# Altium PCB PCB1.PcbDoc
Units mil, origin at the board's own origin, x right, y up, seen from the top; angles counter-clockwise.
Board outline 2790.91 x 2890 mil, 2 copper layers (Top Layer, Bottom Layer); 61 components, 64 nets, 228 pads, 75 vias.
Unrouted connection lines stored in the file: 38.
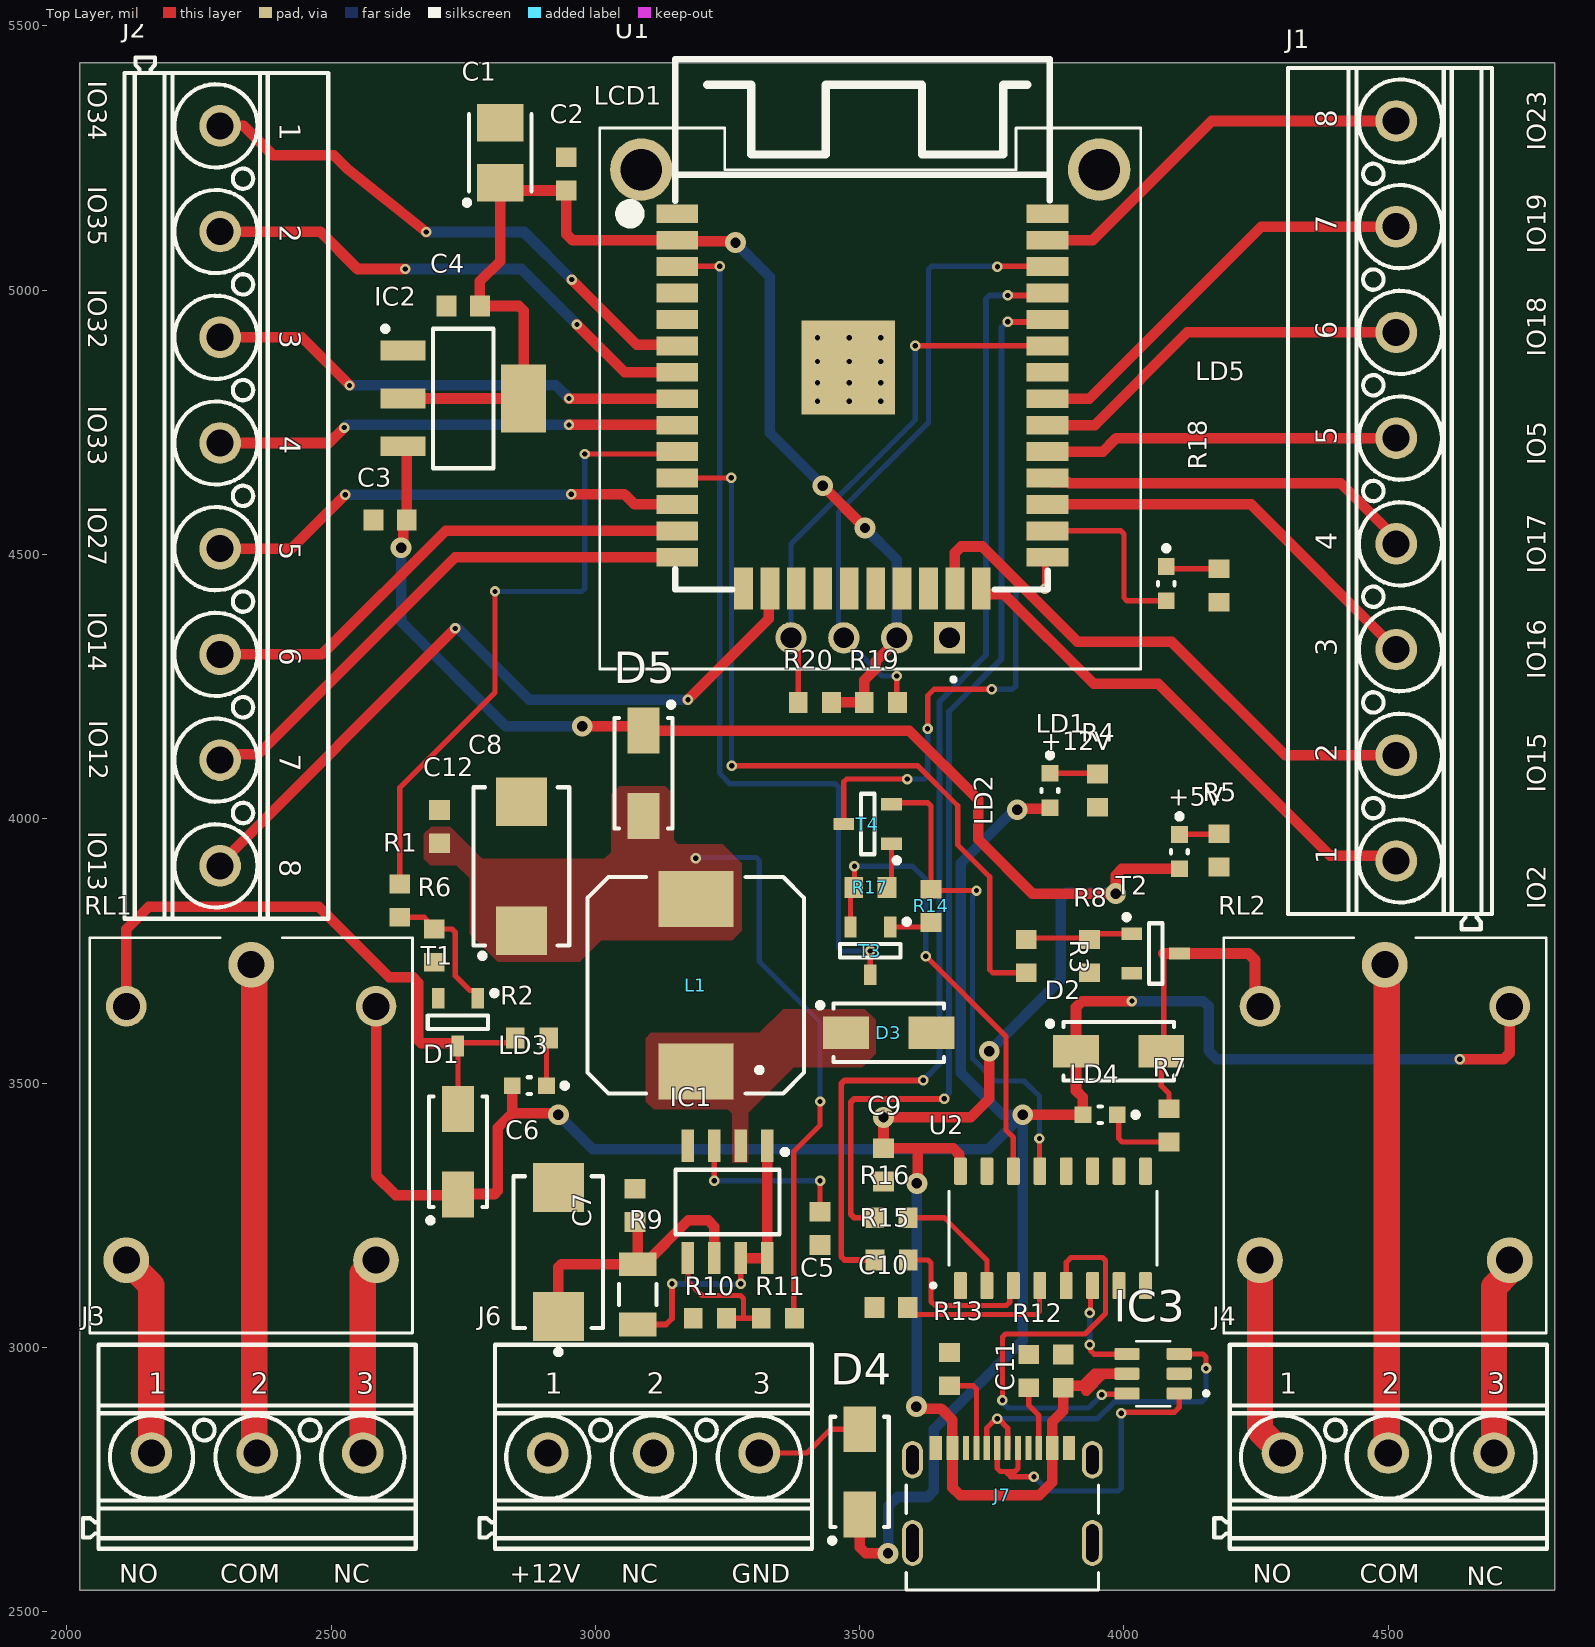
[diagram p0: Top Layer view]
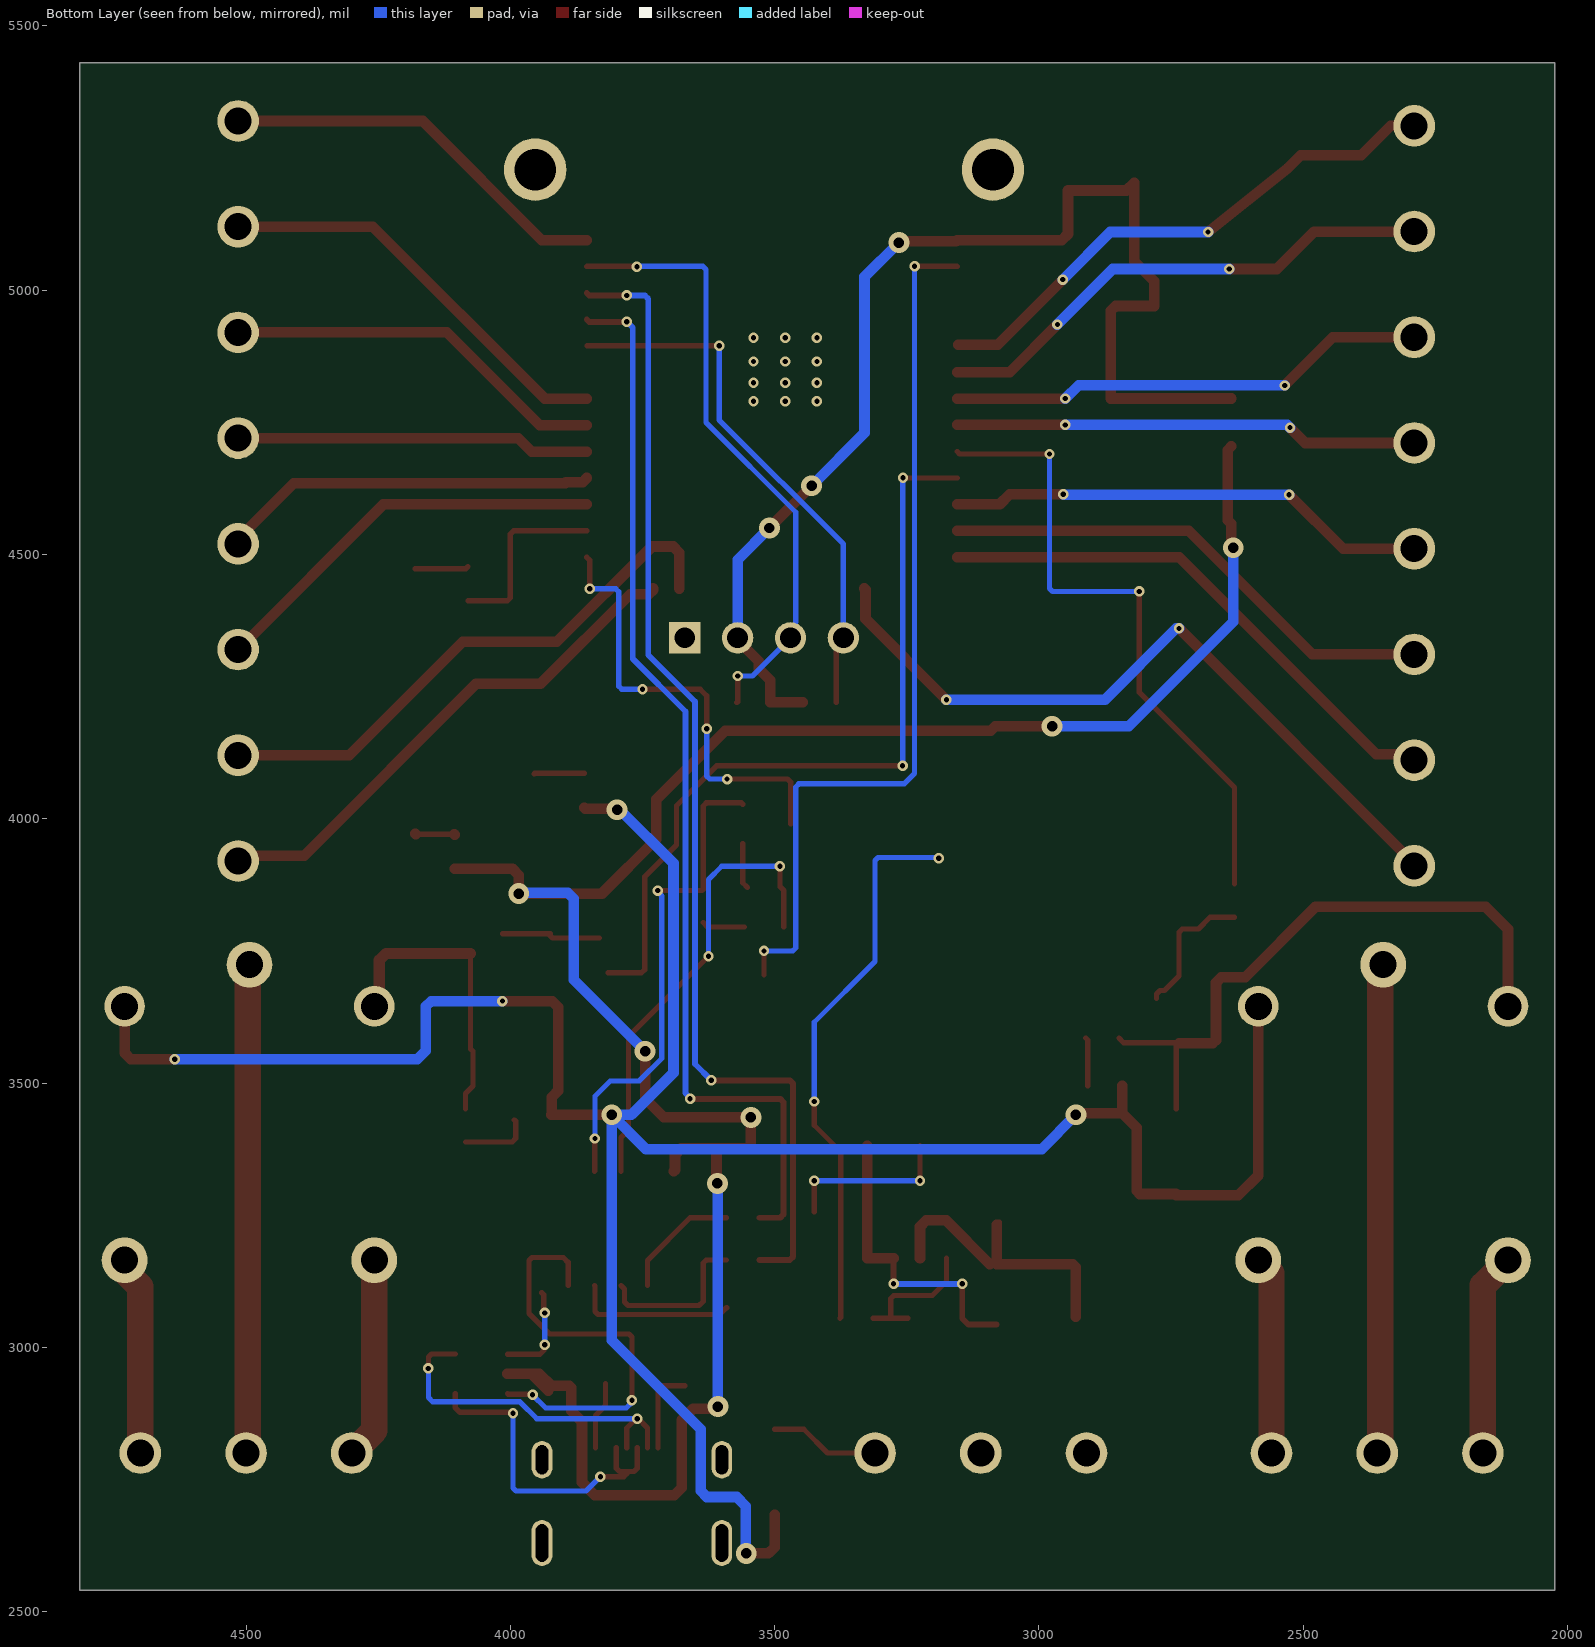
[diagram p1: Bottom Layer view, seen from below]
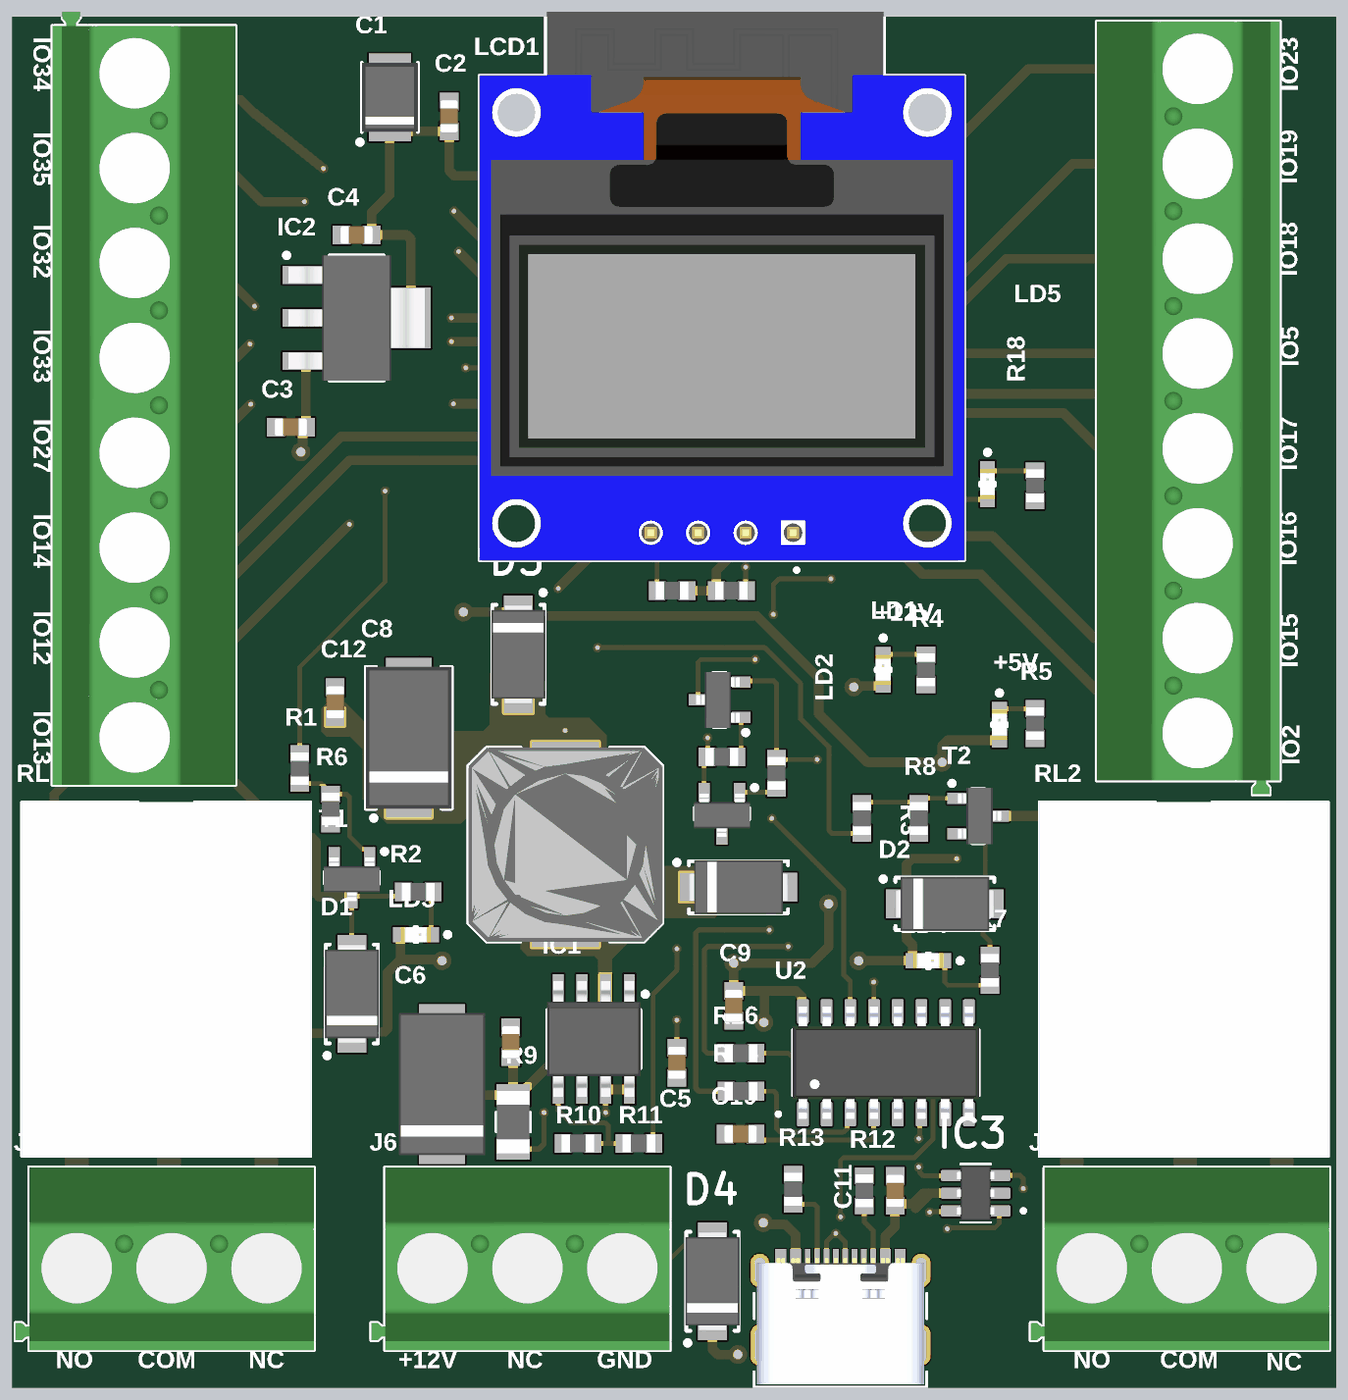
[diagram p2: 3D render of the assembled board from above, using the file's embedded part models]

## Layer stack, top to bottom
Top Solder: solder mask 0.4, Solder Resist, Dk 3.5
Top Layer: signal copper 1.4
Dielectric 1: dielectric 12.6, FR-4, Dk 4.8
Bottom Layer: signal copper 1.4
Bottom Solder: solder mask 0.4, Solder Resist, Dk 3.5

## Board outline
2024.09,2540 2024.09,5430 4815,5430 4815,2540

## Design rules (kind name [scope] priority, off if disabled: settings)
Clearance [All] p1: gap=7 ignorepadtopadclearanceinfootprint=FALSE
DiffPairsRouting [All] p1: maxlimit=10 minlimit=5.91 mostfreqgap=10 toplayer_minwidth=7.87 toplayer_maxwidth=15 toplayer_prefwidth=15 bottomlayer_minwidth=7.87 bottomlayer_maxwidth=15 bottomlayer_prefwidth=15 maxuncoupledlength=500
PolygonConnect [All] p1: connectstyle=Direct reliefconductorwidth=10 reliefentries=4 polygonreliefangle="90 Angle" airgapwidth=10
RoutingVias [All] p1: holewidth=28 width=50 viastyle="Through Hole" minholewidth=7.87 minwidth=19.68 maxholewidth=28 maxwidth=50
SolderMaskExpansion [All] p1: expansion=4 istentingtop=FALSE
SupplyNets "Schematic Supply Nets_4" [InNet('+5V')] p1: voltage=0.000
SupplyNets "Schematic Supply Nets_3" [InNet('+3V3')] p2: voltage=0.000
SupplyNets "Schematic Supply Nets_2" [InNet('VCC')] p3: voltage=0.000
SupplyNets "Schematic Supply Nets_1" [InNet('+12V')] p4: voltage=0.000
SupplyNets "Schematic Supply Nets" [InNet('GND')] p5: voltage=0.000
Width [All] p1: maxlimit=100 minlimit=10 preferedwidth=10 minimp=50.000000 maximp=50.000000 favimp=50.000000
29 further rules are at their usual default settings.

## Classes and differential pairs
component class Power: C3 C4 C5 C6 C7 C8 C12 D3 D4 D5 IC1 IC2 J6 L1 R9 R10 R11
component class Core: C1 C2 D1 D2 J2 J3 J4 LCD1 LD3 LD4 LD5 R1 R2 R3 R6 R7 R8 R18 R19 R20 RL1 RL2 T1 T2 U1
component class Com: C9 C10 C11 IC3 J7 R12 R13 R15 R16 R17 T3 T4 U2

## Components (designator, comment, footprint, x,y, rotation, side; value= is the part's Value field where it differs from the comment)
C1 "22uF" CAPMP3528X210N 2820,5260 r90 top
C2 "100nF" CAPC1608X87N 2945,5220 r270 top
C3 "100nF" CAPC1608X87N 2611.5,4565 r0 top
C4 "100nF" CAPC1608X87N 2750,4970 r0 top
C5 "470pF" CAPC1608X87N 3425,3225 r270 top
C6 "100uF" CAPMP7343X200N 2930,3180 r90 top
C7 "100nF" CAPC1608X87N 3075,3268.5 r270 top
C8 "470uF" CAPMP7343X310N 2860,3910 r90 top
C9 "100nF" CAPC1608X87N 3545,3345 r90 top
C10 "100nF" CAPC1608X87N 3559.33,3075 r0 top
C11 "100nF" CAPC1608X87N 3885,2955 r270 top
C12 "100nF" CAPC1608X87N 2705,3985 r90 top
D1 "SS16" DIOM5127X229N 2740,3370 r90 top
D2 "SS16" DIOM5127X229N 3990,3560 r0 top
D3 "SS16" DIOM5127X229N 3555,3595 r0 top
D4 "SS16" DIOM5127X229N 3500,2764.29 r90 top
D5 "SS16" DIOM5127X229N 3091,4086 r270 top
IC1 "MC34063AD" SOIC127P600X175-8N 3250,3275 r270 top
IC2 "SPX1117M3-L-1-8" SOT230P700X180-4N 2750,4795 r0 top
IC3 "usbClamp" usbClamps 4055,2950 r180 top
J1 "" PHOENIX_1715789 4515,4620 r90 top
J2 "" PHOENIX_1715789 2290,4610.83 r270 top
J3 "" PHOENIX_1715734 2360,2800 r0 top
J4 "" PHOENIX_1715734 4500,2800 r0 top
J6 "" PHOENIX_1715734 3110,2800 r0 top
J7 "2171790001" TYPEC 3770,2675 r0 top
L1 "220uH" IND_EPCOS_B82464-G4 3190,3685 r90 top value=470uH
LCD1 "OLED" OLED 3520,4795 r180 top locked
LD1 "Red" LED_KINGBRIGHT_KPH-1608SURCK 3860,4053.27 r270 top
LD2 "Green" LED_KINGBRIGHT_KP-1608CGCK 4105,3937.52 r270 top
LD3 "Red" LED_KINGBRIGHT_KPH-1608SURCK 2875,3495 r180 top
LD4 "Red" LED_KINGBRIGHT_KPH-1608SURCK 3955,3440 r180 top
LD5 "Green" LED_KINGBRIGHT_KP-1608CGCK 4080,4444.72 r270 top
R1 "220" RESC1608X55N 2630,3845 r270 top
R2 "2k2" RESC1608X55N 2880,3585 r0 top
R3 "220" RESC1608X55N 3815,3740 r90 top
R4 "2k2" RESC1608X55N 3950,4053.27 r90 top
R5 "470" RESC1608X55N 4180,3940 r90 top
R6 "10k" RESC1608X55N 2695,3760 r270 top
R7 "2k2" RESC1608X55N 4085,3420 r270 top
R8 "10k" RESC1608X55N 3935,3740 r270 top
R9 "0R33" RESC3216X65N 3080,3100 r270 top
R10 "1R2" RESC1608X55N 3216.5,3055 r0 top
R11 "3R6" RESC1608X55N 3345,3055 r0 top
R12 "5k1" RESC1608X55N 3820,2955 r90 top
R13 "5k1" RESC1608X55N 3670,2958.5 r90 top
R14 "10k" RESC1608X55N 3635,3835 r270 top
R15 "100" RESC1608X55N 3560.32,3165 r180 top
R16 "100" RESC1608X55N 3560,3245 r180 top
R17 "10k" RESC1608X55N 3520,3870 r0 top
R18 "47" RESC1608X55N 4180,4441.22 r90 top
R19 "10k" RESC1608X55N 3540,4220 r180 top
R20 "10k" RESC1608X55N 3415,4220 r0 top
RL1 "RELAY-PR13-12V-450-1C" RELAY_PR13-12V-450-1C 2350.24,3400 r270 top
RL2 "RELAY-PR13-12V-450-1C" RELAY_PR13-12V-450-1C 4495,3400 r270 top
T1 "BC817-40" SOT95P230X110-3N 2740,3615 r270 top
T2 "BC817-40" SOT95P230X110-3N 4060,3745 r0 top
T3 "BC817" SOT95P230X110-3N 3520,3750 r270 top
T4 "BC817" SOT95P230X110-3N 3515,3990 r180 top
U1 "ESP32-WROOM-32E" ESP32 3505,4790 r0 top locked
U2 "CH340" CH340 3865.69,3225 r90 top

## Footprints (in the part's own frame and the unit in brackets; to place one, negate y for a bottom-side part, rotate by r counter-clockwise, add the part's x,y. Pads: shape width x height; smd on the part's side, far side on the other; paste and mask are expansions set on the pad)
CAPC1608X87N [mm] "Chip Capacitor, Body 1.6x0.8mm IPC Medium Density"
  rect 0.95x1 smd: 1(-0.8,0) 2(0.8,0)
  body extent -0.87,-0.47 0.88,0.48, height 0.87
CAPMP3528X210N [mm] "Capacitor, Polarized, Molded  Body 3.5x2.8mm, IPC Medium Density"
  rect 1.8x2.25 smd: 1(-1.45,0) 2(1.45,0)
  silkscreen extent -2.52,-1.5 1.85,1.72, body extent -1.85,-1.5 1.85,1.5, height 2.1
CAPMP7343X200N [mm] "Capacitor, Polarized, Molded  Body 7.3x4.3mm, IPC Medium Density"
  rect 2.35x2.45 smd: 1(-3.1,0) 2(3.1,0)
  silkscreen extent -4.92,-2.15 3.65,2.15, body extent -3.8,-2.3 3.8,2.3, height 2
CAPMP7343X310N [mm] "Capacitor, Polarized, Molded  Body 7.3x4.3mm, IPC Medium Density"
  rect 2.35x2.45 smd: 1(-3.1,0) 2(3.1,0)
  silkscreen extent -4.42,-2.3 3.8,2.3, body extent -3.8,-2.3 3.8,2.3, height 3.1
CH340 [mm]
  rrect25% 1.31x0.62 smd: 1(-2.75,4.445) 2(-2.75,3.175) 3(-2.75,1.905) 4(-2.75,0.635) 5(-2.75,-0.635) 6(-2.75,-1.905) 7(-2.75,-3.175) 8(-2.75,-4.445) 9(2.75,-4.445) 10(2.75,-3.175) 11(2.75,-1.905) 12(2.75,-0.635) 13(2.75,0.635) 14(2.75,1.905) 15(2.75,3.175) 16(2.75,4.445)
  silkscreen extent -2.85,-5 1.78,5.85, body extent -3,-5 3,5, height 1.8
DIOM5127X229N [mm] "DO-214-AC/SMA Diode, Molded Body; 5.10mm L X 2.67mm W X 2.29mm H, IPC Medium Density"
  rect 2.2x1.55 smd: 1(-2.05,0) 2(2.05,0)
  silkscreen extent -3.42,-1.4 2.65,1.45, body extent -2.67,-1.45 2.68,1.45, height 2.29
ESP32 [mm]
  rect 2x0.9 smd: 1(-8.9,9.005) 2(-8.9,7.735) 3(-8.9,6.465) 4(-8.9,5.195) 5(-8.9,3.925) 6(-8.9,2.655) 7(-8.9,1.385) 8(-8.9,0.115) 9(-8.9,-1.155) 10(-8.9,-2.425) 11(-8.9,-3.695) 12(-8.9,-4.965) 13(-8.9,-6.235) 14(-8.9,-7.505) 25(8.9,-7.505) 26(8.9,-6.235) 27(8.9,-4.965) 28(8.9,-3.695) 29(8.9,-2.425) 30(8.9,-1.155) 31(8.9,0.115) 32(8.9,1.385) 33(8.9,2.655) 34(8.9,3.925) 35(8.9,5.195) 36(8.9,6.465) 37(8.9,7.735) 38(8.9,9.005)
  rect 0.9x2 smd: 15(-5.71,-9.005) 16(-4.44,-9.005) 17(-3.17,-9.005) 18(-1.9,-9.005) 19(-0.63,-9.005) 20(0.64,-9.005) 21(1.91,-9.005) 22(3.18,-9.005) 23(4.45,-9.005) 24(5.72,-9.005)
  rect 4.5x4.5 smd paste-0.115: 39(-0.675,1.615)
  silkscreen extent -11.53,-9.05 9,16.44, body extent -8.98,-8.97 9.02,16.53, height 3.28
IND_EPCOS_B82464-G4 [mm] "SMD Inductor Body Width 10.4mm Body Lenght 10.4mm Height 4.8mm"
  rect 2.7x3.6 smd: 1(-4.15,0) 2(4.15,0)
  silkscreen extent -5.2,-5.2 5.2,5.2, body extent -5.2,-5.2 5.2,5.2, height 4.9
LED_KINGBRIGHT_KP-1608CGCK [mm] "SMT Green LED, Case 0603, Body L 1.60mm x W 0.80mm x H 1.10mm"
  rect 0.8x0.8 smd: 1(-0.825,0) 2(0.825,0)
  silkscreen extent -1.82,-0.4 0.08,0.4, body extent -0.8,-0.4 0.8,0.4, height 1.1
LED_KINGBRIGHT_KPH-1608SURCK [mm] "SMT Hyper Red LED, Case 0603, Body L 1.6 x W 0.8mm H 0.65mm"
  rect 0.8x0.8 smd: 1(-0.825,0) 2(0.825,0)
  silkscreen extent -1.82,-0.4 0.08,0.4, body extent -0.8,-0.4 0.8,0.4, height 0.65
OLED [mm]
  rect 1.508x1.508 / inner round 1.508 / far side rect 1.508x1.508 hole 1: 1(-3.81,11.5)
  round 1.508 hole 1: 2(-1.27,11.5) 3(1.27,11.5) 4(3.81,11.5)
  round 3 hole 2: S3(11,-11) S4(-11,-11)
  silkscreen extent -13,-13 13,13.6, body extent -13,-13 13,13, height 6.66
PHOENIX_1715734 [mm] "Terminal Block, 17.5A 400V, Pitch 5.08mm, 3 Positions, Screw Connection"
  round 2 hole 1.3: 1(-5.08,0) 2(0,0) 3(5.08,0)
  silkscreen extent -8.36,-4.6 7.62,5.2, body extent -8.36,-4.6 7.62,5.2, height 14.2
PHOENIX_1715789 [mm] "Terminal Block, 17.5A 400V, Pitch 5.08mm, 8 Positions, Screw Connection"
  round 2 hole 1.3: 1(-17.78,0) 2(-12.7,0) 3(-7.62,0) 4(-2.54,0) 5(2.54,0) 6(7.62,0) 7(12.7,0) 8(17.78,0)
  silkscreen extent -21.06,-4.6 20.32,5.2, body extent -21.06,-4.6 20.32,5.2, height 14.2
RELAY_PR13-12V-450-1C [mm]
  round 1.95 hole 1.3: A1(-6.226,5.963) A2(-6.226,-6.037)
  round 2.2 hole 1.3: COM(-8.226,-0.037) NC(5.974,5.963) NO(5.974,-6.037)
  silkscreen extent -9.53,-7.79 9.47,7.71, body extent -9.53,-7.79 9.47,7.71, height 15.5
RESC1608X55N [mm] "Chip Resistor, EIA 0603, Metric 1608, Body 1.6x0.8mm, IPC Medium Density"
  rect 0.9x1 smd: 1(-0.8,0) 2(0.8,0)
  body extent -0.87,-0.47 0.88,0.48, height 0.55
RESC3216X65N [mm] "Chip Resistor, EIA 1206, Metric 3216, Body 3.2x1.6mm, IPC Medium Density"
  rect 1.15x1.8 smd: 1(-1.45,0) 2(1.45,0)
  silkscreen extent -0.5,-0.9 0.5,0.9, body extent -1.67,-0.87 1.68,0.88, height 0.65
SOIC127P600X175-8N [mm] "SOIC 8, Pitch 1.27mm - Body 4x5mm, IPC Medium Density"
  rect 1.55x0.6 smd: 1(-2.7,1.905) 2(-2.7,0.635) 3(-2.7,-0.635) 4(-2.7,-1.905) 5(2.7,-1.905) 6(2.7,-0.635) 7(2.7,0.635) 8(2.7,1.905)
  silkscreen extent -2.52,-2.5 1.55,2.88, body extent -3.1,-2.5 3.1,2.5, height 1.75
SOT95P230X110-3N [mm] "SOT23, 3 pin, Pitch 0.95mm - 1.3mm W X 2.9mm L X 1.1mm H, IPC Medium Density"
  rect 1x0.6 smd: 1(-1.15,0.95) 2(-1.15,-0.95) 3(1.15,0)
  silkscreen extent -1.52,-1.45 0.33,1.88, body extent -1.08,-1.5 1.25,1.5, height 1.1
SOT230P700X180-4N [mm] "SOT223, 2.30mm pitch; 3 pin, 3.70mm W X 6.70mm L, IPC Medium Density"
  rect 2.15x0.95 smd: 1(-2.9,2.3) 2(-2.9,0) 3(-2.9,-2.3)
  rect 2.15x3.25 smd: 4(2.9,0)
  silkscreen extent -3.87,-3.35 1.45,3.47, body extent -3.65,-3.35 3.65,3.35, height 1.81
TYPEC [mm]
  rect 0.59x1.15 smd mask+0.064: A1B12(-3.2,3.425) A4B9(-2.4,3.425) B1A12(3.2,3.425) B4A9(2.4,3.425)
  rect 0.298x1.15 smd mask+0.064: A5(-1.25,3.425) A6(-0.25,3.425) A7(0.25,3.425) A8(1.25,3.425) B5(1.75,3.425) B6(0.75,3.425) B7(-0.75,3.425) B8(-1.75,3.425)
  oval 1x2.2 hole 0.6 slot 1.8 at 90 deg mask+0.064: SH1(-4.32,-1.15) SH2(4.32,-1.15)
  oval 1x1.8 hole 0.6 slot 1.4 at 90 deg mask+0.064: SH3(-4.32,2.85) SH4(4.32,2.85)
  silkscreen extent -4.62,-3.4 4.62,1.63, body extent -4.47,-3.25 4.47,3.5, height 3.24
usbClamps [mm]
  rrect25% 1.21x0.59 smd: 1(-1.255,0.95) 2(-1.255,0) 3(-1.255,-0.95) 4(1.255,-0.95) 5(1.255,0) 6(1.255,0.95)
  silkscreen extent -2.66,-1.57 0.81,1.57, body extent -1.4,-1.46 1.4,1.46, height 0.4

## Part data
C1: library part CTE3528-21_22UF_10V_10%_LESR0700, "Polarised capacitor", Case=B, Manufacturer=GENERIC, Manufacturer1 ComponentHeight=2.1mm, Manufacturer1 Example=AVX, Manufacturer1 Part Number=TPSB226K010R0700, Tolerance=±10%, Voltage=10V, Author="CERN DEM JLC", Component Type=Standard, CreateDate=5.05.2008, HelpURL=\\cern.ch\dfs\Applications\Altium\Datasheets\CTE-LESR_AVX_TPS.pdf, LatestRevisionDate=20.01.2009, Manufacturer Part Number=CTE3528-21_22UF_10V_10%_LESR0700, Mounted=Yes, Part Description="Low ESR 0R7 Solid Tantalum Chip Capacitor", Part Number=CTE3528-21_22UF_10V_10%_LESR0700, Pin Count=2, Sense=No, SMD=Yes, Socket=No, Status=Preferred
C2 C3 C4 C7 C9 C10 C11 C12: library part CC0603_100NF_50V_10%_X5R, "Non-polarised capacitor", Case=0603, Manufacturer=GENERIC, Manufacturer1 ComponentHeight=0.9mm, Manufacturer1 Example=TDK, Manufacturer1 Part Number=C1608X5R1H104K080, Tolerance=±10%, Voltage=50V, Author="CERN DEM MR", Component Type=Standard, CreateDate=8.01.2016, HelpURL=\\cern.ch\dfs\Applications\Altium\Datasheets\CC0603_X5R_TDK_C.pdf, LatestRevisionDate=8.01.2016, Manufacturer Part Number=CC0603_100NF_50V_10%_X5R, Mounted=Yes, Part Description="SMD Multilayer Chip Ceramic Capacitor", Part Number=CC0603_100NF_50V_10%_X5R, Pin Count=2, Sense=No, SMD=Yes, Socket=No, Status=None, TC=X5R
C5: library part CC0603_470PF_50V_5%_NP0, "Non-polarised capacitor", Case=0603, Manufacturer=GENERIC, Manufacturer1 ComponentHeight=0.87mm, Manufacturer1 Example=PHYCOMP, Manufacturer1 Part Number=223886715471, Tolerance=±5%, Voltage=50V, Author="CERN DEM JLC", Component Type=Standard, CreateDate=3.12.2007, HelpURL=\\cern.ch\dfs\Applications\Altium\Datasheets\CC0603_NP0_PHYCOMP.pdf, LatestRevisionDate=3.12.2007, Manufacturer Part Number=CC0603_470PF_50V_5%_NP0, Mounted=Yes, Part Description="SMD Multilayer Chip Ceramic Capacitor", Part Number=CC0603_470PF_50V_5%_NP0, Pin Count=2, Sense=No, SMD=Yes, Socket=No, Status=Preferred, TC=C0G/NP0
C6: library part CTE7343-20_100UF_10V_20%_SANYO_TPC, "Polarised capacitor", Case=V, Manufacturer=SANYO, Manufacturer Part Number=10TPC100M, Tolerance=±20%, Voltage=10V, Author="CERN DEM JLC", Component Type=Standard, ComponentHeight=2mm, CreateDate=29.06.2011, HelpURL=\\cern.ch\dfs\Applications\Altium\Datasheets\CTE_SANYO_TPC.pdf, LatestRevisionDate=29.06.2011, Mounted=Yes, Part Description="ESR 0R045 Tantalum Chip Capacitor", Part Number=CTE7343-20_100UF_10V_20%_SANYO_TPC, Pin Count=2, Sense=No, SMD=Yes, Socket=No, Status=None
C8: library part CTE7343-31_470UF_6.3V_10%, "Polarised capacitor", Case=D, Manufacturer=GENERIC, Manufacturer1 ComponentHeight=3.1mm, Manufacturer1 Example=AVX, Manufacturer1 Part Number=TAJD477K006R, Tolerance=±10%, Voltage=6.3V, Author="CERN DEM JLC", Component Type=Standard, CreateDate=3.12.2007, HelpURL=\\cern.ch\dfs\Applications\Altium\Datasheets\CTE_AVX_TAJ.pdf, LatestRevisionDate=3.12.2007, Manufacturer Part Number=CTE7343-31_470UF_6.3V_10%, Mounted=Yes, Part Description="Solid Tantalum Chip Capacitor", Part Number=CTE7343-31_470UF_6.3V_10%, Pin Count=2, Sense=No, SMD=Yes, Socket=No, Status=Preferred
D1 D2 D3 D4 D5: "Schottky Diode", Case=DO-214AC, Manufacturer="VISHAY GENERAL SEMICONDUCTOR", Power=1A, Voltage=60V, Author="CERN DEM JLC", Bonding=No, Component Type=Standard, ComponentHeight=2.29mm, CreateDate=15.07.2008, Device=SS16, HelpURL=\\cern.ch\dfs\Applications\Altium\Datasheets\SS16.pdf, LatestRevisionDate=23.08.2010, Manufacturer Part Number=SS16, Mounted=Yes, PackageDescription="DO-214-AC/SMA Diode, Molded Body; 5.10mm L X 2.67mm W X 2.29mm H, IPC Medium Density", Part Description="Surface Mount Schottky Barrier Rectifier", Part Number=SS16, Pin Count=2, PressFit=No, Sense=No, SMD=Yes, Socket=No
IC1: "3V to 40V 1.5A Peak Boost/Buck/Inverting Switching Regulator", Case=SOIC8, Manufacturer="TEXAS INSTRUMENTS", Author="CERN DEM JLC", Bonding=No, Component Type=Standard, ComponentHeight=1.75mm, CreateDate=27.10.2009, Device=MC34063AD, HelpURL=\\cern.ch\dfs\Applications\Altium\Datasheets\MC34063AD.pdf, LatestRevisionDate=27.10.2009, Manufacturer Part Number=MC34063AD, Mounted=Yes, PackageDescription="SOIC 8, Pitch 1.27mm, Body 4x5mm, IPC Medium Density", Part Description="3V to 40V 1.5A Peak Boost/Buck/Inverting Switching Regulator", Part Number=MC34063AD, Pin Count=8, PressFit=No, Sense=No, SMD=Yes, Socket=No
IC2: "3-Terminal Regulator 1=GND 2=OUT 3=IN 4=OUT", Case=SOT223, Manufacturer=EXAR, Author="CERN DEM JLC", Bonding=No, Component Type=Standard, ComponentHeight=1.8mm, CreateDate=5.07.2011, Device=SPX1117M3-L-1-8, HelpURL=\\cern.ch\dfs\Applications\Altium\Datasheets\SPX1117M3-L-1-8.pdf, LatestRevisionDate=5.07.2011, Manufacturer Part Number=SPX1117M3-L-1-8, Mounted=Yes, PackageDescription="SOT223, 2.30mm Pitch; 4 Pin, 3.70mm W X 6.70mm L X 1.80mm H body, IPC Medium Density", Part Description="1.8V 800mA Low Dropout Voltage Regulator", Part Number=SPX1117M3-L-1-8, Pin Count=4, PressFit=No, Sense=No, SMD=Yes, Socket=No
J1 J2: library part PHOENIX_1715789, "Terminal Block, 8 Positions, Screw Connection", Manufacturer="PHOENIX CONTACT", Manufacturer Part Number="1715789 (MKDS 1,5/8-5,08)", Author="CERN DEM JMW", Component Type=Standard, ComponentHeight=13.8mm, CreateDate=25.02.2013, HelpURL=\\cern.ch\dfs\Applications\Altium\Datasheets\PHOENIX_1715789.pdf, LatestRevisionDate=25.02.2013, Mounted=Yes, Part Description="17.5A, 400V, Terminal Block, Pitch 5.08mm, 8 Positions, Screw Connection", Part Number=PHOENIX_1715789, Pin Count=8, PressFit=No, Sense=No, SMD=No, Socket=No, Status=None
J3 J4 J6: library part PHOENIX_1715734, "Terminal Block, 3 Positions, Screw Connection", Manufacturer="PHOENIX CONTACT", Manufacturer Part Number="1715734 (MKDS 1,5/3-5,08)", Author="CERN DEM JLC", Component Type=Standard, ComponentHeight=13.8mm, CreateDate=6.01.2010, HelpURL=\\cern.ch\dfs\Applications\Altium\Datasheets\PHOENIX_1715734.pdf, LatestRevisionDate=25.02.2013, Mounted=Yes, Part Description="17.5A, 400V, Terminal Block, Pitch 5.08mm, 3 Positions, Screw Connection", Part Number=PHOENIX_1715734, Pin Count=3, PressFit=No, Sense=No, SMD=No, Socket=No, Status=None
J7: library part "TypeC USB2.0 16pin SMD"
L1: library part IND_470UH_20%_EPCOS_B82464-G4, "Inductor With Core", Manufacturer=EPCOS, Manufacturer Part Number=B82464–G4474–M, Power=0.5A, Resistance=0.93R, Tolerance=±20%, Author="CERN DEM JLC", Component Type=Standard, ComponentHeight=4.8mm, CreateDate=17.11.2008, HelpURL=\\cern.ch\dfs\Applications\Altium\Datasheets\IND_EPCOS_B82464-G4.pdf, LatestRevisionDate=17.11.2008, Mounted=Yes, Part Description="SMT Power Inductor", Part Number=IND_470UH_20%_EPCOS_B82464-G4, Pin Count=2, Sense=No, SMD=Yes, Socket=No
LCD1: library part "OLED SCREEN"
LD1 LD3 LD4: library part LED_KINGBRIGHT_KPH-1608SURCK, "LED Red 1C 2A", Case=0603, Manufacturer=KINGBRIGHT, Manufacturer Part Number=KPH-1608SURCK, Author="CERN DEM JLC", Bonding=No, Color=Red, Component Type=Standard, ComponentHeight=0.65mm, CreateDate=3.07.2017, HelpURL=\\cern.ch\dfs\Applications\Altium\Datasheets\LED_KINGBRIGHT_KPH-1608SURCK.pdf, LatestRevisionDate=3.07.2017, Mounted=Yes, PackageDescription="SMT Hyper Red LED, Case 0603, Body L 1.6 x W 0.8mm H 0.65mm", Part Description="SMD Hyper Red LED, Case 1.6mmX0.8mm(0603), 0.65mm Thickness", Part Number=LED_KINGBRIGHT_KPH-1608SURCK, Pin Count=2, PressFit=No, Sense=No, SMD=Yes, Socket=No
LD2 LD5: library part LED_KINGBRIGHT_KP-1608CGCK, "LED Green 1C 2A", Case=0603, Manufacturer=KINGBRIGHT, Manufacturer Part Number=KP-1608CGCK, Author="CERN DEM HF", Bonding=No, Color=Green, Component Type=Standard, ComponentHeight=1.1mm, CreateDate=1.10.2021, HelpURL=\\cern.ch\dfs\Applications\Altium\Datasheets\LED_KINGBRIGHT_KP-1608CGCK.pdf, LatestRevisionDate=1.10.2021, Mounted=Yes, PackageDescription="SMT Green LED, Case 0603, Body L 1.60mm x W 0.80mm x H 1.10mm", Part Description="1.6x0.8mm SMD Chip Green LED Lamp", Part Number=LED_KINGBRIGHT_KP-1608CGCK, Pin Count=2, PressFit=No, Sense=No, SMD=Yes, Socket=No
R1 R3: library part R0603_220R_1%_0.1W_100PPM, "Resistor - 1%", Case=0603, Manufacturer=GENERIC, Manufacturer1 ComponentHeight=0.55mm, Manufacturer1 Example="NIC COMPONENT", Manufacturer1 Part Number=NRC06F2200TRF, Power=0.1W, Tolerance=±1%, Author="CERN DEM JLC", Component Type=Standard, CreateDate=3.12.2007, HelpURL=\\cern.ch\dfs\Applications\Altium\Datasheets\R0603_NIC_NRC.pdf, LatestRevisionDate=13.03.2008, Manufacturer Part Number=R0603_220R_1%_0.1W_100PPM, Mounted=Yes, Part Description="General Purpose Thick Film Chip Resistor", Part Number=R0603_220R_1%_0.1W_100PPM, Pin Count=2, PressFit=No, Sense=No, SMD=Yes, Socket=No, Status=Preferred, TC=±100ppm/°C
R2 R4 R7: library part R0603_2K2_1%_0.1W_100PPM, "Resistor - 1%", Case=0603, Manufacturer=GENERIC, Manufacturer1 ComponentHeight=0.55mm, Manufacturer1 Example="NIC COMPONENT", Manufacturer1 Part Number=NRC06F2201TRF, Power=0.1W, Tolerance=±1%, Author="CERN DEM JLC", Component Type=Standard, CreateDate=3.12.2007, HelpURL=\\cern.ch\dfs\Applications\Altium\Datasheets\R0603_NIC_NRC.pdf, LatestRevisionDate=13.03.2008, Manufacturer Part Number=R0603_2K2_1%_0.1W_100PPM, Mounted=Yes, Part Description="General Purpose Thick Film Chip Resistor", Part Number=R0603_2K2_1%_0.1W_100PPM, Pin Count=2, PressFit=No, Sense=No, SMD=Yes, Socket=No, Status=Preferred, TC=±100ppm/°C
R5: library part R0603_470R_1%_0.1W_100PPM, "Resistor - 1%", Case=0603, Manufacturer=GENERIC, Manufacturer1 ComponentHeight=0.55mm, Manufacturer1 Example="NIC COMPONENT", Manufacturer1 Part Number=NRC06F4700TRF, Power=0.1W, Tolerance=±1%, Author="CERN DEM JLC", Component Type=Standard, CreateDate=3.12.2007, HelpURL=\\cern.ch\dfs\Applications\Altium\Datasheets\R0603_NIC_NRC.pdf, LatestRevisionDate=13.03.2008, Manufacturer Part Number=R0603_470R_1%_0.1W_100PPM, Mounted=Yes, Part Description="General Purpose Thick Film Chip Resistor", Part Number=R0603_470R_1%_0.1W_100PPM, Pin Count=2, PressFit=No, Sense=No, SMD=Yes, Socket=No, Status=Preferred, TC=±100ppm/°C
R6 R8 R14 R17: library part R0603_10K_1%_0.1W_100PPM, "Resistor - 1%", Case=0603, Manufacturer=GENERIC, Manufacturer1 ComponentHeight=0.55mm, Manufacturer1 Example="NIC COMPONENT", Manufacturer1 Part Number=NRC06F1002TRF, Power=0.1W, Tolerance=±1%, Author="CERN DEM JLC", Component Type=Standard, CreateDate=3.12.2007, HelpURL=\\cern.ch\dfs\Applications\Altium\Datasheets\R0603_NIC_NRC.pdf, LatestRevisionDate=13.03.2008, Manufacturer Part Number=R0603_10K_1%_0.1W_100PPM, Mounted=Yes, Part Description="General Purpose Thick Film Chip Resistor", Part Number=R0603_10K_1%_0.1W_100PPM, Pin Count=2, PressFit=No, Sense=No, SMD=Yes, Socket=No, Status=Preferred, TC=±100ppm/°C
R9: library part R1206_0R33_1%_0.5W_600PPM, "Resistor - 1%", Case=1206, Manufacturer="YAGEO PHYCOMP", Manufacturer Part Number="RL1206FR-7W0R33 (235051913307)", Power=0.5W, Tolerance=±1%, Author="CERN DEM JMW", Component Type=Standard, ComponentHeight=0.65mm, CreateDate=6.01.2009, HelpURL=\\cern.ch\dfs\Applications\Altium\Datasheets\R1206_PHYCOMP_LRC02P.pdf, LatestRevisionDate=6.01.2009, Mounted=Yes, Part Description="Low Ohmique High Power Chip Resistor", Part Number=R1206_0R33_1%_0.5W_600PPM, Pin Count=2, PressFit=No, Sense=No, SMD=Yes, Socket=No, Status="Not Recommended", TC=±600ppm/°C
R10: library part R0603_1R2_1%_0.1W_200PPM, "Resistor - 1%", Case=0603, Manufacturer=GENERIC, Manufacturer1 ComponentHeight=0.65mm, Manufacturer1 Example="YAGEO PHYCOMP", Manufacturer1 Part Number="232270461208L or RC0603FR-071R2L", Power=0.1W, Tolerance=±1%, Author="CERN DEM JLC", Component Type=Standard, CreateDate=3.12.2007, HelpURL=\\cern.ch\dfs\Applications\Altium\Datasheets\R0603_Phycomp_RC0603.pdf, LatestRevisionDate=17.10.2012, Manufacturer Part Number=R0603_1R2_1%_0.1W_200PPM, Mounted=Yes, Part Description="General Purpose Thick Film Chip Resistor", Part Number=R0603_1R2_1%_0.1W_200PPM, Pin Count=2, PressFit=No, Sense=No, SMD=Yes, Socket=No, Status=Preferred, TC=±200ppm/°C
R11: library part R0603_3R6_1%_0.1W_200PPM, "Resistor - 1%", Case=0603, Manufacturer=GENERIC, Manufacturer1 ComponentHeight=0.65mm, Manufacturer1 Example="YAGEO PHYCOMP", Manufacturer1 Part Number="232270463608L or RC0603FR-073R6L", Power=0.1W, Tolerance=±1%, Author="CERN DEM JLC", Component Type=Standard, CreateDate=3.12.2007, HelpURL=\\cern.ch\dfs\Applications\Altium\Datasheets\R0603_Phycomp_RC0603.pdf, LatestRevisionDate=17.10.2012, Manufacturer Part Number=R0603_3R6_1%_0.1W_200PPM, Mounted=Yes, Part Description="General Purpose Thick Film Chip Resistor", Part Number=R0603_3R6_1%_0.1W_200PPM, Pin Count=2, PressFit=No, Sense=No, SMD=Yes, Socket=No, Status=Preferred, TC=±200ppm/°C
R12 R13: library part R0603_5K1_1%_0.1W_100PPM, "Resistor - 1%", Case=0603, Manufacturer=GENERIC, Manufacturer1 ComponentHeight=0.55mm, Manufacturer1 Example="NIC COMPONENT", Manufacturer1 Part Number=NRC06F5101TRF, Power=0.1W, Tolerance=±1%, Author="CERN DEM JLC", Component Type=Standard, CreateDate=3.12.2007, HelpURL=\\cern.ch\dfs\Applications\Altium\Datasheets\R0603_NIC_NRC.pdf, LatestRevisionDate=13.03.2008, Manufacturer Part Number=R0603_5K1_1%_0.1W_100PPM, Mounted=Yes, Part Description="General Purpose Thick Film Chip Resistor", Part Number=R0603_5K1_1%_0.1W_100PPM, Pin Count=2, PressFit=No, Sense=No, SMD=Yes, Socket=No, Status=Preferred, TC=±100ppm/°C
R15 R16: library part R0603_100R_1%_0.1W_100PPM, "Resistor - 1%", Case=0603, Manufacturer=GENERIC, Manufacturer1 ComponentHeight=0.55mm, Manufacturer1 Example="NIC COMPONENT", Manufacturer1 Part Number=NRC06F4700TRF, Power=0.1W, Tolerance=±1%, Author="CERN DEM JLC", Component Type=Standard, CreateDate=3.12.2007, HelpURL=\\cern.ch\dfs\Applications\Altium\Datasheets\R0603_NIC_NRC.pdf, LatestRevisionDate=13.03.2008, Manufacturer Part Number=R0603_100R_1%_0.1W_100PPM, Mounted=Yes, Part Description="General Purpose Thick Film Chip Resistor", Part Number=R0603_100R_1%_0.1W_100PPM, Pin Count=2, PressFit=No, Sense=No, SMD=Yes, Socket=No, Status=Preferred, TC=±100ppm/°C
R18: library part R0603_47R_1%_0.1W_100PPM, "Resistor - 1%", Case=0603, Manufacturer=GENERIC, Manufacturer1 ComponentHeight=0.55mm, Manufacturer1 Example="NIC COMPONENT", Manufacturer1 Part Number=NRC06F47R0TRF, Power=0.1W, Tolerance=±1%, Author="CERN DEM JLC", Component Type=Standard, CreateDate=3.12.2007, HelpURL=\\cern.ch\dfs\Applications\Altium\Datasheets\R0603_NIC_NRC.pdf, LatestRevisionDate=13.03.2008, Manufacturer Part Number=R0603_47R_1%_0.1W_100PPM, Mounted=Yes, Part Description="General Purpose Thick Film Chip Resistor", Part Number=R0603_47R_1%_0.1W_100PPM, Pin Count=2, PressFit=No, Sense=No, SMD=Yes, Socket=No, Status=Preferred, TC=±100ppm/°C
R19 R20: library part R0603_10K_0.1%_0.063W_10PPM, "Resistor - 0.1%", Case=0603, Manufacturer=GENERIC, Manufacturer1 ComponentHeight=0.5mm, Manufacturer1 Example="TYCO HOLSWORTHY", Manufacturer1 Part Number=RN73C1J10KBTDF, Power=0.063W, Tolerance=±0.1%, Author="CERN DEM JLC", Component Type=Standard, CreateDate=3.12.2007, HelpURL=\\cern.ch\dfs\Applications\Altium\Datasheets\R0603_Tyco_RN73.pdf, LatestRevisionDate=13.03.2008, Manufacturer Part Number=R0603_10K_0.1%_0.063W_10PPM, Mounted=Yes, Part Description="Thin Film Chip Resistor", Part Number=R0603_10K_0.1%_0.063W_10PPM, Pin Count=2, PressFit=No, Sense=No, SMD=Yes, Socket=No, Status="Not Recommended", TC=±10ppm
T1 T2 T3 T4: "NPN Transistor", Case=SOT23-3, Manufacturer="NXP SEMICONDUCTORS", Bonding=No, Component Type=Standard, ComponentHeight=1.1mm, Mounted=Yes, PackageDescription="SOT23, 0.95mm Pitch; 3 Pin, 1.30mm W X 2.90mm L X 1.10mm H body, IPC Medium Density", Part Description="45V 500mA NPN General-Purpose Transistor", Pin Count=3, PressFit=No, Sense=No, SMD=Yes, Socket=No
  T1 T2: Author="CERN DEM BC", CreateDate=29.04.2020, Device=BC817-40, HelpURL=\\cern.ch\dfs\Applications\Altium\Datasheets\BC817-40.pdf, LatestRevisionDate=29.04.2020, Manufacturer Part Number=BC817-40, Part Number=BC817-40
  T3 T4: Author="CERN DEM JLC", CreateDate=12.05.2011, Device=BC817, HelpURL=\\cern.ch\dfs\Applications\Altium\Datasheets\BC817.pdf, LatestRevisionDate=12.05.2011, Manufacturer Part Number=BC817, Part Number=BC817

## Via types
v1: diameter 19.68, hole 10, Top Layer to Bottom Layer, tented both sides, 49 vias
v2: diameter 39.37, hole 19.68, Top Layer to Bottom Layer, tented both sides, 14 vias
v3: diameter 19.68, hole 10, Top Layer to Bottom Layer, 12 vias

## Nets (pads, with @x,y where several pads share a name; then routed paths per layer and width w, separated by ;. In a path a pad name is that pad's centre, name@x,y a point inside that pad or via, vN(x,y) a via of type N, cw(c..) or ccw(c..) an arc to the next point about the centre after c; other vN are vias at no path point)
+3V3: C1.1 C2.2 C4.2 IC2.2 IC2.4 LCD1.2 R19.2 R20.2 U1.2 | length 2350.3
  Top Layer w20: IC2.2 IC2.4 2864.17,4960.83 2855,4970 C4.2 2781.5,5016.5 2820,5055 C1.1 2834.41,5188.5 C2.2 ; C2.2@2945,5185.55 2945,5106.24 2956.72,5094.53 U1.2 3156.87,5092.26 3262.74,5092.26 v2(3265,5090) ; v2(3430,4630) v2(3510,4550) ; R20.2 R19.2 3508.5,4261.85 3530.17,4283.52 3530.17,4297.66 3570,4337.49 LCD1.2
  Bottom Layer w20: v2(3265,5090) 3330,5025 3330,4730 v2(3430,4630) ; v2(3510,4550) 3570,4490 LCD1.2
+5V: C3.2 C9.2 C11.2 D5.1 IC2.3 IC3.5 J7.A4B9 J7.B4A9 LD2.2 U2.16 | length 4373.2
  Top Layer w20: v2(2632.47,4512.53) 2636.17,4516.24 2636.17,4558.18 C3.2 2642.99,4697.28 IC2.3 ; v2(2975,4175) 3082.71,4175 D5.1 3593.72,4166.71 3724,4036.43 3724,3961 3826.59,3858.41 v2(3984.25,3858.41) 3984.25,3893.32 3995.97,3905.04 LD2.2 ; v2(3607.33,2887.83) 3611.04,2884.12 3653.73,2884.12 3675.38,2862.48 3675.38,2809.98 J7.A4B9 3675.51,2734.49 3690,2720 3840,2720 3864.49,2744.49 J7.B4A9 3864.49,2859.49 3885,2880 C11.2 3888.65,2927.16 3922.16,2927.16 3945,2950 IC3.5 ; v2@3610,3310 3610,3372.35 3614.14,3376.5 ; U2.16 3688.48,3335.47 3688.48,3364.78 3676.77,3376.5 3614.14,3376.5 ; v2(3745,3560) 3745,3470 3710,3435 v2(3545,3435) C9.2 3614.14,3376.5 ; 3928.27,2918.29 3959.01,2949.03 3960.69,2949.03
  Bottom Layer w20: v2(2632.47,4512.53) 2632.47,4372.53 2830,4175 v2(2975,4175) ; v2(3607.33,2887.83) 3607.82,2888.32 3607.82,3309.51 v2(3608.31,3310) ; v2(3745,3560) 3880,3695 3880,3848.28 3891.72,3860 v2@3985,3860
+12V: D1.1 D2.1 D4.1 LD1.2 LD3.2 LD4.2 RL1.A1 RL2.A1 | length 4981.7
  Top Layer w10: D1.1 D1.1@2740.71,3290
  Top Layer w20: RL1.A1 2585,3325 2622.68,3287.32 D1.1@2740,3287.32 ; D1.1@2740.71,3290 2809.14,3290 2815,3295.86 2815,3415 2842.52,3442.52 ; LD3.2 2842.52,3442.52 ; v2(2930,3440) 2927.48,3442.52 2842.52,3442.52 ; D4.1 3500,2621.72 3511.72,2610 v2(3553.55,2610) ; v2(3798,4017) 3799.89,4018.89 3858.11,4018.89 LD1.2 ; v2(3808.31,3440) LD4.2@3921.08,3440 ; LD4.2 3921.8,3440.72 3921.8,3473.2 3909.29,3485.71 D2.1 3909.29,3643.28 3921.01,3655 v1(4015,3655) ; v1(4635,3545) 4718.04,3545 4729.76,3556.72 RL2.A1
  Bottom Layer w20: v2(2930,3440) 2995,3375 3743.32,3375 v2(3808.31,3440) ; v2(3553.55,2610) 3554.38,2610.83 3554.38,2699.38 3571.72,2716.72 3628.28,2716.72 3640,2728.43 3640,2845.13 3808.31,3013.44 v2(3808.31,3440) ; v2(3798,4017) 3792.76,4017 3691.31,3915.56 3691.31,3519.58 3770.89,3440 v2(3808.31,3440) ; v1(4015,3655) 4150,3655 4160,3645 4160,3560.86 4175.86,3545 v1(4635,3545)
DTR: R14.1 T4.2 U2.13 | length 941.7
  Top Layer w10: T4.2 3562.87,4030 3629.14,4030 3635,4024.14 R14.1 3637.5,3864 v1(3721,3864) ; v1(3840,3395) 3840.34,3394.66 3840.34,3333.61 U2.13
  Bottom Layer w10: v1(3721,3864) 3721,3861.38 3713.31,3853.69 3713.31,3546.88 3756.28,3503.91 3811.09,3503.91 3840,3475 v1(3840,3395)
ESP32_BOOT: T4.3 U1.25 | length 866.3
  Top Layer w10: T4.3 3469.72,4069.14 3475.58,4075 v1(3590,4075) ; v1(3628.43,4170) 3628.59,4170.17 3628.59,4232.73 3640.86,4245 v1(3750,4245) ; v1(3850,4435) 3850,4489.13 U1.25
  Bottom Layer w10: v1(3590,4075) 3622.73,4075 3628.59,4080.86 3628.59,4169.83 v1(3628.43,4170) ; v1(3750,4245) 3789.14,4245 3795,4250.86 3795,4429.14 3800.86,4435 v1(3850,4435)
ESP32_EN: T3.3 U1.3 | length 1687.5
  Top Layer w10: U1.3 3155.08,5045 v1@3235,5045 ; T3.3 3520.09,3704.81 3520.09,3749.74 v1(3520.17,3749.83)
  Bottom Layer w10: v1@3235,5045 3235.25,5044.75 3235.25,4085.75 3255,4066 3454.14,4066 3460,4060.14 3460,3755.69 3465.86,3749.83 v1(3520.17,3749.83)
  other v1: 3235.25,5045.17
GND: C1.2 C2.1 C3.1 C4.1 C5.2 C6.2 C7.1 C8.2 C9.1 C10.1 C11.1 C12.2 D3.2 IC1.4 IC2.1 IC3.2 J6.1 J7.A1B12 J7.B1A12 J7.SH1 J7.SH2 J7.SH3 J7.SH4 LCD1.1 R4.1 R5.1 R6.2 R8.2 R10.1 R12.2 R13.2 R18.1 T1.2 T2.2 U1.1 U1.15 U1.38 U1.39 U2.1
  other v3: 3420,4790 3480,4790 3540,4790 3420,4825 3480,4825 3540,4825 3420,4865 3480,4865 3540,4865 3420,4910 3480,4910 3540,4910
IO2: J1.1 U1.24 | length 999.9
  Top Layer w20: U1.24 3730.2,4432.72 3737.91,4425 3773,4425 3942.97,4255.03 4064.97,4255.03 4390,3930 4505,3930 J1.1
IO4: LD5.2 U1.26 | length 350
  Top Layer w10: U1.26 3994.14,4544.53 4000,4538.67 4000,4418.1 4005.86,4412.24 LD5.2
IO5: J1.5 U1.29 | length 670.2
  Top Layer w20: U1.29 3959.53,4694.53 3985,4720 J1.5
IO12: J2.7 U1.14 | length 1023.5
  Top Layer w20: J2.7 2301.24,4122.07 2362.07,4122.07 2734.53,4494.53 U1.14
IO13: J2.8 U1.16 | length 1404.2
  Top Layer w20: J2.8 2290,3915 v1(2735,4360) ; v1(3175,4225) 3328.08,4378.08 3328.08,4433.35 U1.16
  Bottom Layer w20: v1(2735,4360) 2740,4360 2875,4225 v1(3175,4225)
IO14: J2.6 U1.13 | length 961.8
  Top Layer w10: U1.13@3154.13,4545 U1.13
  Top Layer w20: J2.6 2482.64,4310.83 2716.82,4545 2950,4545 U1.13@3154.13,4545
IO15: J1.2 U1.23 | length 1071.1
  Top Layer w20: U1.23 3680.2,4503.28 3691.91,4515 3732.04,4515 3912.04,4335 4090,4335 4305,4120 J1.2
IO16: J1.3 U1.27 | length 773.3
  Top Layer w20: U1.27 4240.47,4594.53 J1.3
IO17: J1.4 U1.28 | length 717
  Top Layer w20: U1.28 3863.11,4636.81 3894.67,4636.81 3896.48,4635 4410,4635 4515,4530 J1.4
IO18: J1.6 U1.30 | length 732.3
  Top Layer w20: U1.30 3944.53,4744.53 4120,4920 J1.6
IO19: J1.7 U1.31 | length 794.4
  Top Layer w20: U1.31 3934.53,4794.53 4260,5120 J1.7
IO23: J1.8 U1.37 | length 753
  Top Layer w20: U1.37 3940.47,5094.53 4165.95,5320 J1.8
IO27: J2.5 U1.12 | length 914.2
  Top Layer w20: J2.5 2424.56,4510.83 v1(2526.79,4613.06) ; v1(2954.08,4614.08) 3054.98,4614.08 3074.53,4594.53 U1.12
  Bottom Layer w20: v1(2526.79,4613.06) 2953.06,4613.06 v1@2953.16,4613.16
IO32: J2.3 U1.8 | length 912.8
  Top Layer w20: J2.3 2444.17,4910.83 v1@2535,4820 ; v1(2950,4795) 2950.47,4794.53 U1.8
  Bottom Layer w20: v1@2535,4820 2925,4820 v1(2950,4795)
  other v1: 2534.83,4819.62
IO33: J2.4 U1.9 | length 879
  Top Layer w10: U1.9@3154.13,4745 U1.9
  Top Layer w20: J2.4 2495.83,4710.83 v1(2525,4740) ; v1(2950,4745) U1.9@3154.13,4745
  Bottom Layer w20: v1(2525,4740) 2530,4745 v1(2950,4745)
IO34: J2.1 U1.6 | length 1026.2
  Top Layer w20: J2.1 2334.17,5310.83 2390,5255 2505,5255 2529.5,5230.5 2530.36,5229.81 v1(2680,5110) ; v1(2955,5020) 3078.19,4896.81 U1.6@3152.32,4896.81
  Bottom Layer w20: v1(2680,5110) 2865,5110 v1(2955,5020)
IO35: J2.2 U1.7 | length 974.9
  Top Layer w20: J2.2 2479.17,5110.83 2550,5040 v1(2640,5040) ; v1(2965,4935) 3055.47,4844.53 U1.7
  Bottom Layer w20: v1(2640,5040) 2860,5040 v1(2965,4935)
NetC5_1: C5.1 IC1.3 | length 324.8
  Top Layer w10: v1(3225,3315) IC1.3 ; C5.1 v1(3425,3315)
  Bottom Layer w10: v1(3225,3315) v1(3425,3315)
NetC8_1: C8.1 C12.1 D5.2 L1.2 R11.2 | length 1058
  Top Layer w10: R11.2 3375,3056.5 3375,3370.01 3425,3420.01 v1(3425,3465)
  Bottom Layer w10: v1@3190,3925 3191.72,3926.72 3304.14,3926.72 3310,3920.87 3310,3730 3425,3615 v1(3425,3465)
  other v1: 3189.66,3925.34
NetC10_2: C10.2 U2.4 | length 306.2
  Top Layer w10: C10.2 3603.88,3061.94 3834.14,3061.94 3840,3067.8 3840,3116.04 U2.4
NetD1_2: D1.2 R2.1 RL1.A2 T1.3 | length 1196.9
  Top Layer w10: 2665,3580.86 2670.86,3575 ; T1.3@2734.72,3575 T1.3@2736.75,3572.97 ; D1.2 T1.3 2740,3576.22 2839.72,3576.22 R2.1
  Top Layer w20: RL1.A2 2112.56,3790.82 2155.04,3833.3 2476.7,3833.3 2610,3700 2655,3700 2665,3690 2665,3580.86 ; 2670.86,3575 T1.3@2734.72,3575
NetD2_2: D2.2 R7.1 RL2.A2 T2.3 | length 570.4
  Top Layer w10: 4075.28,3745 4075.28,3564.57 D2.2 4070.71,3494.29 4085,3480 R7.1
  Top Layer w21.26: 4075.28,3745 4235.45,3745 4247.9,3732.55 4247.9,3654.52 RL2.A2
NetD3_1: D3.1 IC1.2 L1.1
NetD4_2: D4.2 J6.3 | length 208.6
  Top Layer w10: J6.3 3400,2800 3445,2845 D4.2
NetJ3_1: J3.1 RL1.NO | length 395.9
  Top Layer w15.75: J3.1 J3.1@2172.05,2812.05
  Top Layer w50: RL1.NO 2112.56,3164.63 2160,3117.19 J3.1@2160,2805.55
NetJ3_2: J3.2 RL1.COM | length 928.5
  Top Layer w10: RL1.COM RL1.COM@2354.39,3718.23 ; J3.2@2354.39,2805.61 J3.2
  Top Layer w50: J3.2@2354.39,2805.61 RL1.COM@2354.39,3718.23
NetJ3_3: J3.3 RL1.NC | length 375.1
  Top Layer w50: J3.3 2560,3139.78 RL1.NC
NetJ4_1: J4.1 RL2.NO | length 382.5
  Top Layer w50: RL2.NO 4257.32,2842.68 J4.1
NetJ4_2: J4.2 RL2.COM | length 926.5
  Top Layer w10: RL2.COM RL2.COM@4496.77,3720.61 ; J4.2@4496.77,2803.23 J4.2
  Top Layer w50: J4.2@4496.77,2803.23 RL2.COM@4496.77,3720.61
NetJ4_3: J4.3 RL2.NC | length 377.1
  Top Layer w50: J4.3 4700,3114.29 4729.76,3144.05 RL2.NC
NetJ7_A5: J7.A5 R13.1 | length 164.5
  Top Layer w10: R13.1 3714.93,2927.01 3720.79,2921.15 J7.A5
NetJ7_A6: IC3.1 J7.A6 J7.B6 | length 639.6
  Top Layer w10: J7.A6 3760.16,2770.86 3766.02,2765 3779.84,2765 ; J7.B6 3799.53,2770.86 3793.67,2765 3779.84,2765 ; v1@3830,2755 3785.7,2755 3779.84,2760.86 3779.84,2765 ; v1(3995,2875) 3996.85,2876.85 4095,2876.85 4104.41,2886.26 IC3.1
  Bottom Layer w10: v1(3829.66,2755.34) 3857,2728 3989.14,2728 3995,2733.86 v1(3995,2875)
NetJ7_A7: IC3.3 J7.A7 J7.B7 | length 670.3
  Top Layer w10: J7.B7 3740.47,2847.48 3757.99,2865 3762.32,2865 3779.84,2847.48 J7.A7 ; IC3.3 4149.14,2987.4 4155,2981.54 v1@4155,2960
  Bottom Layer w10: v1(3760,2865) 3950,2865 3981.84,2896.84 4146.84,2896.84 4155,2905 v1@4155,2960
  other v1: 4155.33,2959.99
NetJ7_B5: J7.B5 R12.1 | length 129
  Top Layer w10: R12.1@3820,2931.02 3820,2890 3838.9,2871.1 J7.B5
NetLD1_1: LD1.1 R4.2 | length 95.4
  Top Layer w10: LD1.1 3954.02,4085.75 R4.2@3955,4084.76
NetLD2_1: LD2.1 R5.2 | length 75.6
  Top Layer w10: LD2.1@4105.75,3970.75 R5.2@4179.25,3970.75
  Top Layer w20: LD2.1 LD2.1@4105.75,3970.75 ; R5.2@4179.25,3970.75 R5.2
NetLD3_1: LD3.1 R2.2 | length 91.7
  Top Layer w10: LD3.1 2907.48,3580.98 R2.2
NetLD4_1: LD4.1 R7.2 | length 133.7
  Top Layer w10: LD4.1@3992.48,3430 3990,3427.52 3990,3395 3996.5,3388.5 R7.2
NetLD5_1: LD5.1 R18.2 | length 101.9
  Top Layer w10: LD5.1 4084.49,4472.72 R18.2
NetR1_2: R1.2 R6.1 T1.1 | length 265.7
  Top Layer w10: R1.2 2676.02,3813.5 2698.03,3791.5 R6.1@2701.97,3791.5 ; R6.1@2700,3791.5 2700.32,3791.17 2728.83,3791.17 2735,3785 2735,3702.68 2762.72,3674.96 2770.59,3674.96 2777.4,3668.15 T1.1
NetR3_2: R3.2 R8.1 T2.1 | length 189.1
  Top Layer w10: R3.2@3831.5,3774.14 3920.31,3774.14 3924.41,3778.24 3924.41,3782.4 T2.1
NetR9_2: IC1.1 IC1.7 IC1.8 R9.2 | length 576.7
  Top Layer w11.02: R9.2 3133.54,3042.91 3145,3054.37 v1(3145,3120) ; v1(3275,3120) IC1.7
  Top Layer w20: IC1.7 IC1.8 IC1.1
  Bottom Layer w11.02: v1(3145,3120) v1(3275,3120)
NetR10_2: IC1.5 R10.2 R11.1 | length 265.4
  Top Layer w10: IC1.5 3175,3125 3201.84,3098.16 3274.49,3098.16 3280.35,3092.3 3280.35,3055 ; R10.2 3280.35,3055 ; R11.1 3280.35,3055
NetR14_2: R14.2 T3.1 | length 81
  Top Layer w10: T3.1 3626.77,3795.28 R14.2
NetR15_1: R15.1 U2.3 | length 306.7
  Top Layer w10: R15.1 3629.14,3165 3635,3159.14 3635,3086.96 3643.02,3078.95 3777.23,3078.95 3784.15,3085.86 3784.15,3110.19 U2.3
NetR16_1: R16.1 U2.2 | length 229.9
  Top Layer w10: R16.1@3591.81,3245 3660,3245 3740.69,3164.31 U2.2
NetR17_2: R17.2 T4.1 | length 86.2
  Top Layer w10: R17.2 3560.28,3878.78 T4.1
RELAY_1: R1.1 U1.10 | length 1231.1
  Top Layer w10: R1.1 2630,4058.79 2810,4238.79 v1(2810,4430) ; v1(2980,4690) 3150.08,4690 U1.10
  Bottom Layer w10: v1(2810,4430) 2974.14,4430 2980,4435.86 v1(2980,4690)
RELAY_2: R3.1 U1.11 | length 1513.6
  Top Layer w10: U1.11 3256.62,4644.53 v1(3257.1,4645) ; v1(3258,4100) 3610.19,4100 3685.6,4024.6 3685.6,3950.4 3746,3890 3746,3714.36 3751.86,3708.5 R3.1
  Bottom Layer w10: v1(3257.1,4645) 3257.55,4644.55 3257.55,4100.45 v1(3258,4100)
RTS: R17.1 T3.2 U2.14 | length 883.6
  Top Layer w10: T3.2 3482.6,3864.09 3490,3871.5 v1(3490,3910) ; v1(3625.11,3739.83) 3776.69,3588.25 3776.69,3499.46 3776.63,3499.41 3776.63,3410.62 3790.69,3396.56 U2.14
  Bottom Layer w10: v1(3490,3910) 3600,3910 3625.11,3884.89 v1(3625.11,3739.83)
SCL: LCD1.3 R19.1 U1.36 | length 1180
  Top Layer w10: v1(3570,4270) 3570,4221.5 R19.1 ; v1@3760,5045 3854.92,5045 U1.36
  Bottom Layer w10: v1(3570,4270) 3542.24,4270 LCD1.3 3460.55,4351.69 3460.55,4372.23 3460,4372.79 3460,4579.76 3630,4749.76 3630,5039.14 3635.86,5045 v1@3760,5045
  other v1: 3760.52,5044.15
SDA: LCD1.4 R20.1 U1.33 | length 1027.9
  Top Layer w10: LCD1.4 3370,4328.88 3383.5,4315.38 R20.1 ; v1(3605,4895) U1.33@3854.92,4895
  Bottom Layer w10: LCD1.4 3370,4519.66 3605,4754.66 v1(3605,4895)
TTL_RX: R15.2 U1.35 | length 2200
  Top Layer w11.02: R15.2 3471.46,3165 3465,3171.46 3465,3498.54 3471.46,3505 v1(3620,3505) ; v1(3780,4990) 3850.87,4990 U1.35
  Bottom Layer w11.02: v1(3620,3505) 3650.78,3535.78 3650.78,4221.51 3739,4309.73 3739,4983.54 3745.46,4990 v1(3780,4990)
TTL_TX: R16.2 U1.34 | length 2037.3
  Top Layer w11.02: R16.2 3489.48,3245 3483.02,3251.46 3483.02,3463.54 3489.48,3470 v1(3660,3470) ; v1(3780,4940) 3850.87,4940 U1.34
  Bottom Layer w11.02: v1(3660,3470) 3660,3471.99 3668.8,3480.79 3668.8,4202.75 3768.51,4302.47 3768.51,4929.21 3779.3,4940 v1(3780,4940)
USB_D+: IC3.6 U2.5 | length 812.5
  Top Layer w10: v1(3770,2900) 3770,3019.14 3775.86,3025 3925.89,3025 3964.89,3064 3964.89,3164.14 3959.04,3170 3900,3170 3890.69,3160.69 U2.5 ; v1(3957.95,2910.01) 3959.24,2911.3 4004.3,2911.3 IC3.6
  Bottom Layer w10: v1@3769.16,2896.54 3780.7,2885 3932.94,2885 v1(3957.95,2910.01) ; v1@3770,2897.38 v1(3770,2900)
USB_D-: IC3.4 U2.6 | length 183.6
  Top Layer w10: v1(3935,3005) 3936.85,3003.15 3936.85,2993.84 3943.77,2986.92 IC3.4@4005.11,2986.92 ; v1(3935,3065) 3936.85,3066.85 3936.85,3099.31 U2.6@3940.69,3103.15
  Bottom Layer w10: v1(3935,3005) v1(3935,3065)
VCC: C6.1 C7.2 IC1.6 R9.1 | length 571.5
  Top Layer w10: C7.2 C7.2@3080,3232.01 ; R9.1 R9.1@3092.8,3157.09
  Top Layer w20: C6.1 2930,3151.23 2935.86,3157.09 R9.1 C7.2@3080,3232.01 ; R9.1@3092.8,3157.09 3175.71,3240 3213.28,3240 3225,3228.28 IC1.6
pads on no net: J6.2 J7.A8 J7.B8 LCD1.S3 LCD1.S4 U1.4 U1.5 U1.17 U1.18 U1.19 U1.20 U1.21 U1.22 U1.32 U2.7 U2.8 U2.9 U2.10 U2.11 U2.12 U2.15

## Polygon pours and split planes (outlines as drawn)
NetC8_1 on Top Layer "NETC8_1_L01_P001" (solid, pour order 1): 3045,4061 3030,4046 3030,3937 3017,3924 2786,3924 2725,3985 2689,3985 2675.47,3971.47 2675.47,3923.98 2687.45,3912 2737,3912 2762,3887 2762,3782 2815,3729 2970,3729 3011,3770 3259,3770 3277,3788 3277,3916 3240.86,3952.14 3155.96,3952.14 3148,3960.1 3148,4045 3132,4061
NetD3_1 on Top Layer "NETD3_1_L01_P000" (solid, pour order 0): 3289,3349 3289,3444 3375,3530 3505,3530 3530,3555 3530,3620 3510,3640 3355,3640 3310,3595 3105,3595 3095,3585 3095,3465 3110,3450 3250,3450 3258.5,3441.5 3258.5,3349

## Other copper
Top Layer:

## Silkscreen, mask and mechanical layers (free items; w line width, h text height)
Top Overlay:
  text "IO34" at 2028.13,5396.24 h60 r270
  text "IO23" at 4810,5263.76 h60 r90
  text "IO35" at 2028.13,5196.24 h60 r270
  text "IO19" at 4810,5068.76 h60 r90
  text "IO32" at 2028.13,5001.24 h60 r270
  text "IO18" at 4810,4873.76 h60 r90
  text "IO33" at 2028.13,4781.24 h60 r270
  text "IO5" at 4810,4668.76 h60 r90
  text "IO27" at 2028.13,4591.24 h60 r270
  text "IO17" at 4810,4463.76 h60 r90
  text "IO14" at 2028.13,4391.24 h60 r270
  text "IO16" at 4810,4263.76 h60 r90
  text "IO12" at 2030,4186.24 h60 r270
  text "+12V" at 3842.67,4117.5 h60
  text "IO15" at 4810,4048.76 h60 r90
  text "+5V" at 4083.91,4012.5 h60
  text "IO13" at 2028.13,3976.24 h60 r270
  text "IO2" at 4810,3828.76 h60 r90
  text "NO" at 2098.91,2542.5 h60
  text "COM" at 2290.64,2542.5 h60
  text "NC" at 2503.91,2542.5 h60
  text "+12V" at 2837.67,2542.5 h60
  text "NC" at 3048.91,2542.5 h60
  text "GND" at 3258,2542.5 h60
  text "NO" at 4243.91,2542.5 h60
  text "COM" at 4445.64,2542.5 h60
  text "NC" at 4648.91,2537.5 h60
Mechanical 1:
  the board outline again, w10

## Text inside footprints (layer, text, board x,y; h text height)
J1: Top Overlay "1" at 4402.5,3913.75 h39.37 r90; Top Overlay "2" at 4402.5,4107.5 h39.37 r90; Top Overlay "3" at 4402.5,4307.5 h39.37 r90; Top Overlay "4" at 4402.5,4507.5 h39.37 r90; Top Overlay "5" at 4402.5,4707.5 h39.37 r90; Top Overlay "6" at 4402.5,4907.5 h39.37 r90; Top Overlay "7" at 4402.5,5107.5 h39.37 r90; Top Overlay "8" at 4402.5,5307.5 h39.37 r90; Mechanical 14 "1" at 4402.5,3913.75 h39.37 r90; Mechanical 14 "2" at 4402.5,4107.5 h39.37 r90; Mechanical 14 "3" at 4402.5,4307.5 h39.37 r90; Mechanical 14 "4" at 4402.5,4507.5 h39.37 r90; Mechanical 14 "5" at 4402.5,4707.5 h39.37 r90; Mechanical 14 "6" at 4402.5,4907.5 h39.37 r90; Mechanical 14 "7" at 4402.5,5107.5 h39.37 r90; Mechanical 14 "8" at 4402.5,5307.5 h39.37 r90
J2: Top Overlay "8" at 2402.5,3923.33 h39.37 r270; Top Overlay "7" at 2402.5,4123.33 h39.37 r270; Top Overlay "6" at 2402.5,4323.33 h39.37 r270; Top Overlay "5" at 2402.5,4523.33 h39.37 r270; Top Overlay "4" at 2402.5,4723.33 h39.37 r270; Top Overlay "3" at 2402.5,4923.33 h39.37 r270; Top Overlay "2" at 2402.5,5123.33 h39.37 r270; Top Overlay "1" at 2402.5,5317.08 h39.37 r270; Mechanical 14 "8" at 2402.5,3923.33 h39.37 r270; Mechanical 14 "7" at 2402.5,4123.33 h39.37 r270; Mechanical 14 "6" at 2402.5,4323.33 h39.37 r270; Mechanical 14 "5" at 2402.5,4523.33 h39.37 r270; Mechanical 14 "4" at 2402.5,4723.33 h39.37 r270; Mechanical 14 "3" at 3360,4860.83 h39.37 r270; Mechanical 14 "2" at 2402.5,5123.33 h39.37 r270; Mechanical 14 "1" at 2402.5,5317.08 h39.37 r270
J3: Top Overlay "1" at 2153.75,2912.5 h39.37; Top Overlay "2" at 2347.5,2912.5 h39.37; Top Overlay "3" at 2547.5,2912.5 h39.37; Mechanical 14 "1" at 2153.75,2912.5 h39.37; Mechanical 14 "2" at 2347.5,2912.5 h39.37; Mechanical 14 "3" at 2547.5,2912.5 h39.37
J4: Top Overlay "1" at 4293.75,2912.5 h39.37; Top Overlay "2" at 4487.5,2912.5 h39.37; Top Overlay "3" at 4687.5,2912.5 h39.37; Mechanical 14 "1" at 4293.75,2912.5 h39.37; Mechanical 14 "2" at 4487.5,2912.5 h39.37; Mechanical 14 "3" at 4687.5,2912.5 h39.37
J6: Top Overlay "3" at 3297.5,2912.5 h39.37; Top Overlay "2" at 3097.5,2912.5 h39.37; Top Overlay "1" at 2903.75,2912.5 h39.37; Mechanical 14 "3" at 3297.5,2912.5 h39.37; Mechanical 14 "2" at 3097.5,2912.5 h39.37; Mechanical 14 "1" at 2903.75,2912.5 h39.37